# EAGLE board interface_b (EAGLE 6.3)
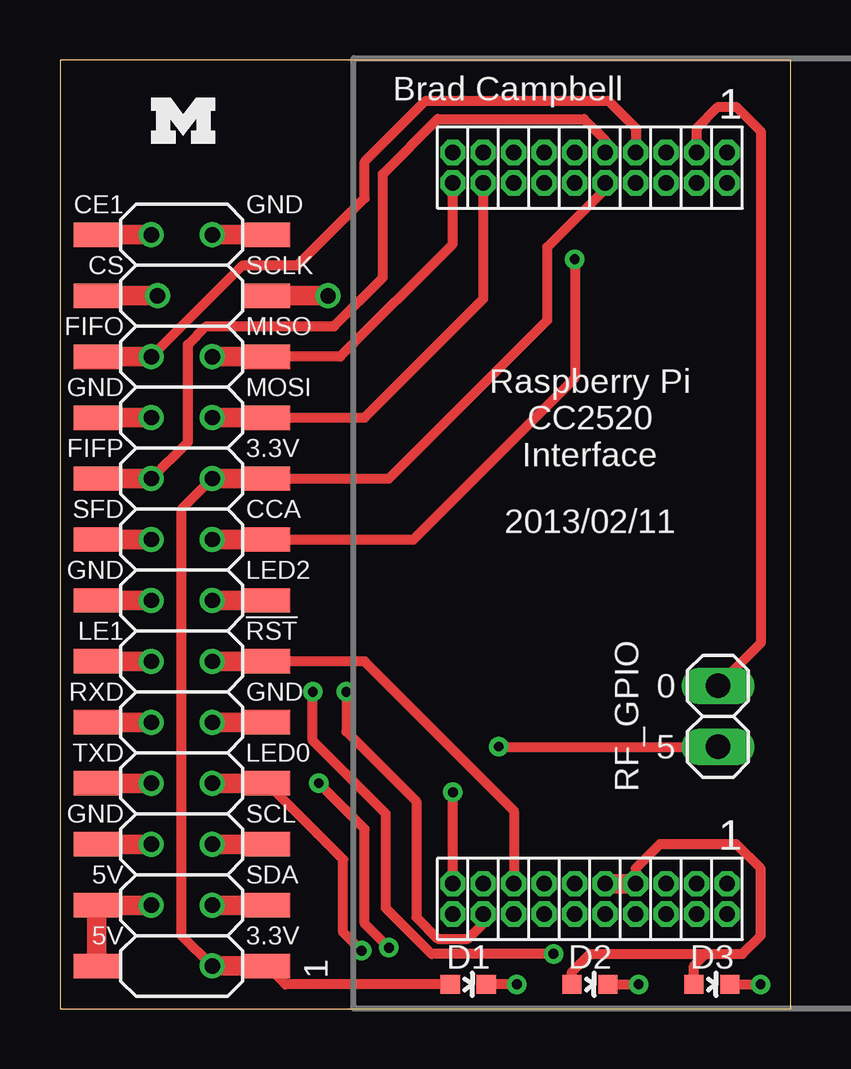
[diagram p0: board, top side]
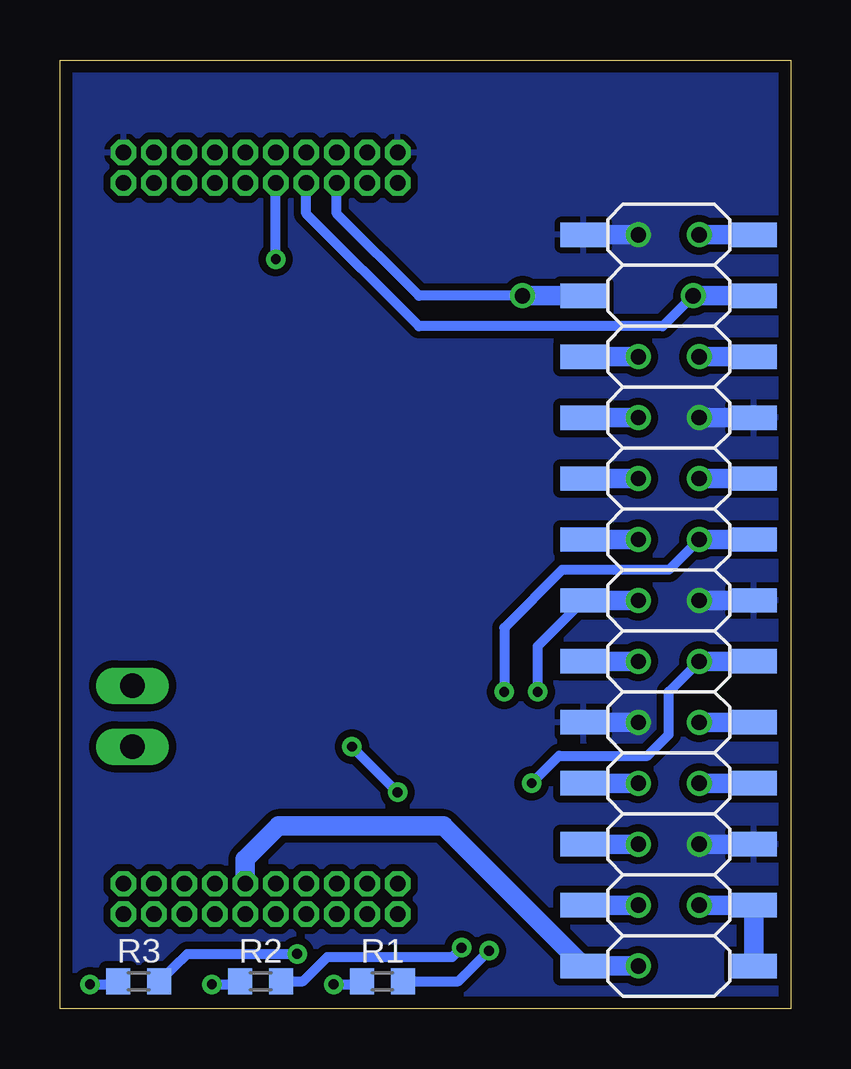
[diagram p1: board, bottom side, seen from below]

Size 30.46 x 39.55 mm. Coordinates in mm from the lower left corner, seen from the top.
Outline: 0,0 30.46,0 30.46,39.55 0,39.55 0,0
Copper layers (1*16): Top 0.0178mm / dielectric 59mil / Bottom 0.0178mm
Design rules "default *": minimum track width 6mil, minimum drill 14mil, track to track 6mil, track to pad 6mil, pad to pad 6mil, via to via 6mil, smd to smd 6mil, copper to edge 20mil, drill to drill 16mil, minimum pad ring 8mil, minimum via ring 8mil, stop-mask expansion 3mil, vias tented up to drill 25mil, thermal gap 10mil

## Footprints (pad centres in the part's own frame; a part is rotated, then mirrored left to right if it is on the bottom)
LED-0603 = smd 0.8 x 0.8: A 0,-0.75; C 0,0.75
TI_CC_EVM = drill 0.65 octagon: P1_1 5.715,15.875; P1_2 5.715,14.605; P1_3 4.445,15.875; P1_4 4.445,14.605; P1_5 3.175,15.875; P1_6 3.175,14.605; P1_7 1.905,15.875; P1_8 1.905,14.605; P1_9 0.635,15.875; P1_10 0.635,14.605; P1_11 -0.635,15.875; P1_12 -0.635,14.605; P1_13 -1.905,15.875; P1_14 -1.905,14.605; P1_15 -3.175,15.875; P1_16 -3.175,14.605; P1_17 -4.445,15.875; P1_18 -4.445,14.605; P1_19 -5.715,15.875; P1_20 -5.715,14.605; P2_1 5.715,-14.605; P2_2 5.715,-15.875; P2_3 4.445,-14.605; P2_4 4.445,-15.875; P2_5 3.175,-14.605; P2_6 3.175,-15.875; P2_7 1.905,-14.605; P2_8 1.905,-15.875; P2_9 0.635,-14.605; P2_10 0.635,-15.875; P2_11 -0.635,-14.605; P2_12 -0.635,-15.875; P2_13 -1.905,-14.605; P2_14 -1.905,-15.875; P2_15 -3.175,-14.605; P2_16 -3.175,-15.875; P2_17 -4.445,-14.605; P2_18 -4.445,-15.875; P2_19 -5.715,-14.605; P2_20 -5.715,-15.875
2X13/SMD = smd 1.016 x 1.905: 1 -15.24,-3.556; 2 -15.24,3.556; 3 -12.7,-3.556; 4 -12.7,3.556; 5 -10.16,-3.556; 6 -10.16,3.556; 7 -7.62,-3.556; 8 -7.62,3.556; 9 -5.08,-3.556; 10 -5.08,3.556; 11 -2.54,-3.556; 12 -2.54,3.556; 13 0,-3.556; 14 0,3.556; 15 2.54,-3.556; 16 2.54,3.556; 17 5.08,-3.556; 18 5.08,3.556; 19 7.62,-3.556; 20 7.62,3.556; 21 10.16,-3.556; 22 10.16,3.556; 23 12.7,-3.556; 24 12.7,3.556; 25 15.24,-3.556; 26 15.24,3.556
1X02 = drill 1.016 long: 1 -1.27,0; 2 1.27,0
R0603 = smd 1 x 1.1: 1 -0.85,0; 2 0.85,0

## Placement (x,y rotation side)
D1  [LED-0603]  17.02,1.02 270 top
D2  [LED-0603]  22.1,1.02 270 top
D3  [LED-0603]  27.18,1.02 270 top
EVM1  CC2520EM  [TI_CC_EVM]  22.1,19.81 0 top
J1  PINHD-2X12/SMD  [2X13/SMD]  5.08,17.02 90 bottom
J2  PINHD-2X12/SMD  [2X13/SMD]  5.08,17.02 90 top
JP1  [1X02]  27.43,12.19 90 top
R1  [R0603]  17.02,1.14 180 bottom
R2  [R0603]  22.1,1.14 180 bottom
R3  [R0603]  27.18,1.14 180 bottom
U$1  UMICH_SOLID_SMALL  [UMICH_SOLID_75MIL]  3.81,36.07 0 top

## Library data of the parts
D1-D3 = SparkFun-LED
EVM1 = brouter
J1 J2 = headers
JP1 = pinhead
R1-R3 = rcl
U$1 = logos

## Nets
5V: J1.1 J1.3 J2.2 J2.4
!RESET: EVM1.P2_15 J1.12 J2.11
CC_GPIO0: EVM1.P1_3 JP1.2
CC_GPIO5: EVM1.P2_19 JP1.1
CCA: EVM1.P1_12 J1.16 J2.15
CE0: EVM1.P1_14 J1.23 J2.24
CE1: J1.25 J2.26
FIFO: EVM1.P1_7 J1.21 J2.22
FIFOP: EVM1.P1_9 J1.17 J2.18
GND: EVM1.P1_1 EVM1.P1_19 J1.5 J1.10 J1.13 J1.19 J1.26 J2.6 J2.9 J2.14 J2.20 J2.25
LED0: J1.8 J2.7 R1.1
LED1: J1.11 J2.12 R2.1
LED2: J1.14 J2.13 R3.1
MISO: EVM1.P1_20 J1.22 J2.21
MOSI: EVM1.P1_18 J1.20 J2.19
N$1: D1.C R1.2
N$2: D2.C R2.2
N$3: D3.C R3.2
SCL: J1.6 J2.5
SCLK: EVM1.P1_16 J1.24 J2.23
SDA: J1.4 J2.3
SFD: EVM1.P2_18 J1.15 J2.16
UART0_RXD: J1.9 J2.10
UART0_TXD: J1.7 J2.8
VCC: D1.A D2.A D3.A EVM1.P1_10 EVM1.P2_7 EVM1.P2_9 J1.2 J1.18 J2.1 J2.17

## Tracks (layer width: path | path; a pad name or v marks a point on that pad's centre or on a via)
5V  (via drill 0.64)
  Top 0.813: J2.2 J2.4 v3.81,4.32
  Bottom 0.813: v3.81,4.32 J2.4 J2.2
!RESET  (via drill 0.64)
  Top 0.406: J2.11 12.7,14.48 18.92,8.26 EVM1.P2_15
  Top 0.813: J2.11 v6.35,14.48
  Bottom 0.813: v6.35,14.48 J2.11
CC_GPIO0
  Top 0.406: EVM1.P1_3 26.54,36.7 27.43,37.59 28.19,37.59 29.21,36.58 29.21,15.24 JP1.2
CC_GPIO5  (via drill 0.41)
  Top 0.406: EVM1.P2_19 v16.38,9.02 | v18.29,10.92 JP1.1
  Bottom 0.406: v16.38,9.02 v18.29,10.92
CCA  (via drill 0.41, 0.64)
  Top 0.406: J1.16 14.73,19.56 21.46,26.29 v21.46,31.24
  Top 0.813: J1.16 v6.35,19.56
  Bottom 0.406: v21.46,31.24 EVM1.P1_12
  Bottom 0.813: v6.35,19.56 J1.16
CE0  (via drill 0.64)
  Top 0.813: v4.06,29.72 J2.24
  Bottom 0.406: v4.06,29.72 5.33,28.45 15.49,28.45 20.19,33.15 EVM1.P1_14
  Bottom 0.813: J2.24 v4.06,29.72
CE1  (via drill 0.64)
  Top 0.813: J2.26 v3.81,32.26
  Bottom 0.813: v3.81,32.26 J2.26
FIFO  (via drill 0.64)
  Top 0.406: EVM1.P1_7 24,36.7 22.86,37.85 15.24,37.85 12.7,35.31 12.7,33.78 9.91,30.99 7.62,30.99 v3.81,27.18
  Top 0.813: v3.81,27.18 J1.21
  Bottom 0.813: v3.81,27.18 J1.21
FIFOP  (via drill 0.64)
  Top 0.406: v3.81,22.1 5.33,23.62 5.33,27.69 6.1,28.45 11.43,28.45 13.46,30.48 13.46,34.8 15.75,37.08 21.84,37.08 22.73,36.2 EVM1.P1_9
  Top 0.813: J1.17 v3.81,22.1
  Bottom 0.813: v3.81,22.1 J1.17
GND  (via drill 0.64)
  Top 0.813: v6.35,32.26 J2.25 | v6.35,11.94 J2.9 | J2.14 v3.81,17.02 | J2.6 v3.81,6.86 | J2.20 v3.81,24.64
  Bottom 0.813: J2.25 v6.35,32.26 | J2.9 v6.35,11.94 | v3.81,17.02 J2.14 | v3.81,6.86 J2.6 | v3.81,24.64 J2.20
  pour Bottom (isolate 0.305): 0,39.62 30.48,39.62 30.48,0 0,0
LED0  (via drill 0.41, 0.64)
  Top 0.406: v12.57,2.41 11.81,3.17 11.81,6.22 J2.7
  Top 0.813: J2.7 v6.35,9.4
  Bottom 0.406: R1.1 13.84,1.14 v12.57,2.41
  Bottom 0.813: v6.35,9.4 J2.7
LED1  (via drill 0.41, 0.64)
  Top 0.406: v13.72,2.54 12.7,3.56 12.7,7.49 v10.79,9.4
  Top 0.813: v3.81,14.48 J2.12
  Bottom 0.406: v13.72,2.54 14.1,2.16 19.3,2.16 20.32,1.14 R2.1 | v10.79,9.4 9.65,10.54 5.97,10.54 5.08,11.43 5.08,13.21 v3.81,14.48
  Bottom 0.813: J2.12 v3.81,14.48
LED2  (via drill 0.41, 0.64)
  Top 0.406: v20.57,2.29 15.49,2.29 13.59,4.19 13.59,8.13 10.54,11.18 v10.54,13.21
  Top 0.813: v6.35,17.02 J2.13
  Bottom 0.406: R3.1 25.15,2.29 v20.57,2.29 | v10.54,13.21 10.54,15.11 J2.13
  Bottom 0.813: J2.13 v6.35,17.02
MISO  (via drill 0.64)
  Top 0.406: J2.21 11.68,27.18 16.38,31.88 EVM1.P1_20
  Top 0.813: J2.21 v6.35,27.18
  Bottom 0.813: v6.35,27.18 J2.21
MOSI  (via drill 0.64)
  Top 0.406: J2.19 12.7,24.64 17.65,29.59 EVM1.P1_18
  Top 0.813: J2.19 v6.35,24.64
  Bottom 0.813: v6.35,24.64 J2.19
N$1  (via drill 0.41)
  Top 0.406: v19.05,1.02 D1.C
  Bottom 0.406: 17.78,1.27 R1.2 18,1.02 v19.05,1.02
N$2  (via drill 0.41)
  Top 0.406: D2.C v24.13,1.02
  Bottom 0.406: 22.85,1.27 R2.2 23.07,1.02 v24.13,1.02
N$3  (via drill 0.41)
  Top 0.406: D3.C v29.21,1.02
  Bottom 0.406: v29.21,1.02 28.16,1.02 R3.2
SCL  (via drill 0.64)
  Top 0.813: J2.5 v6.35,6.86
  Bottom 0.813: v6.35,6.86 J2.5
SCLK  (via drill 0.64)
  Top 0.813: v11.18,29.72 J2.23
  Bottom 0.406: 9.65,29.72 J2.23 | v11.18,29.72 15.49,29.72 18.92,33.15 EVM1.P1_16
  Bottom 0.813: v11.18,29.72 9.65,29.72
SDA  (via drill 0.64)
  Top 0.813: v6.35,4.32 J2.3
  Bottom 0.813: J2.3 v6.35,4.32
SFD  (via drill 0.41, 0.64)
  Top 0.406: v11.94,13.21 11.94,11.56 14.86,8.64 14.86,3.81 15.75,2.92 17.02,2.92 17.65,3.56 EVM1.P2_18
  Top 0.813: v3.81,19.56 J1.15
  Bottom 0.406: v3.81,19.56 5.08,18.29 9.53,18.29 11.94,15.88 v11.94,13.21
  Bottom 0.813: J1.15 v3.81,19.56
UART0_RXD  (via drill 0.64)
  Top 0.813: J2.10 v3.81,11.94
  Bottom 0.813: v3.81,11.94 J2.10
UART0_TXD  (via drill 0.64)
  Top 0.813: v3.81,9.4 J2.8
  Bottom 0.813: J2.8 v3.81,9.4
VCC  (via drill 0.64)
  Top 0.406: v6.35,1.78 5.08,3.05 5.08,20.83 v6.35,22.1 | J2.17 13.72,22.1 20.32,28.7 20.32,31.75 22.73,34.16 EVM1.P1_10 | D1.A 9.4,1.02 J2.1 | D3.A 26.43,1.79 26.92,2.29 | 26.92,2.29 28.45,2.29 29.21,3.05 29.21,5.84 28.19,6.86 25.02,6.86 24,5.84 EVM1.P2_7 | D2.A 21.35,1.54 22.1,2.29 26.92,2.29
  Top 0.813: EVM1.P2_7 EVM1.P2_9 | J2.1 v6.35,1.78 | v6.35,22.1 J2.17
  Bottom 0.813: v6.35,22.1 J2.17 | EVM1.P2_9 22.73,6.22 21.34,7.62 14.48,7.62 J2.1 v6.35,1.78

## Text on the board
tPlace: Brad Campbell | CE1 | GND | CS | SCLK | FIFO | MISO | GND | MOSI | FIFP | 3.3V | Raspberry Pi / CC2520 / Interface | SFD | CCA | 2013/02/11 | GND | LED2 | LE1 | !RST | RXD | GND | 0 | RF_GPIO | TXD | LED0 | 5 | GND | SCL | 5V | SDA | 5V | 3.3V | 1